# Altium PCB Flight_Controller.PcbDoc (part 4 of 4)
Units mil, origin at the board's own origin, x right, y up, seen from the top; angles counter-clockwise.
Board outline 2353.5 x 3084.1 mil, 4 copper layers (Top Layer, Layer 2, Layer 1, Bottom Layer), stack 62.48 mil thick; 95 components, 80 nets, 358 pads, 134 vias.
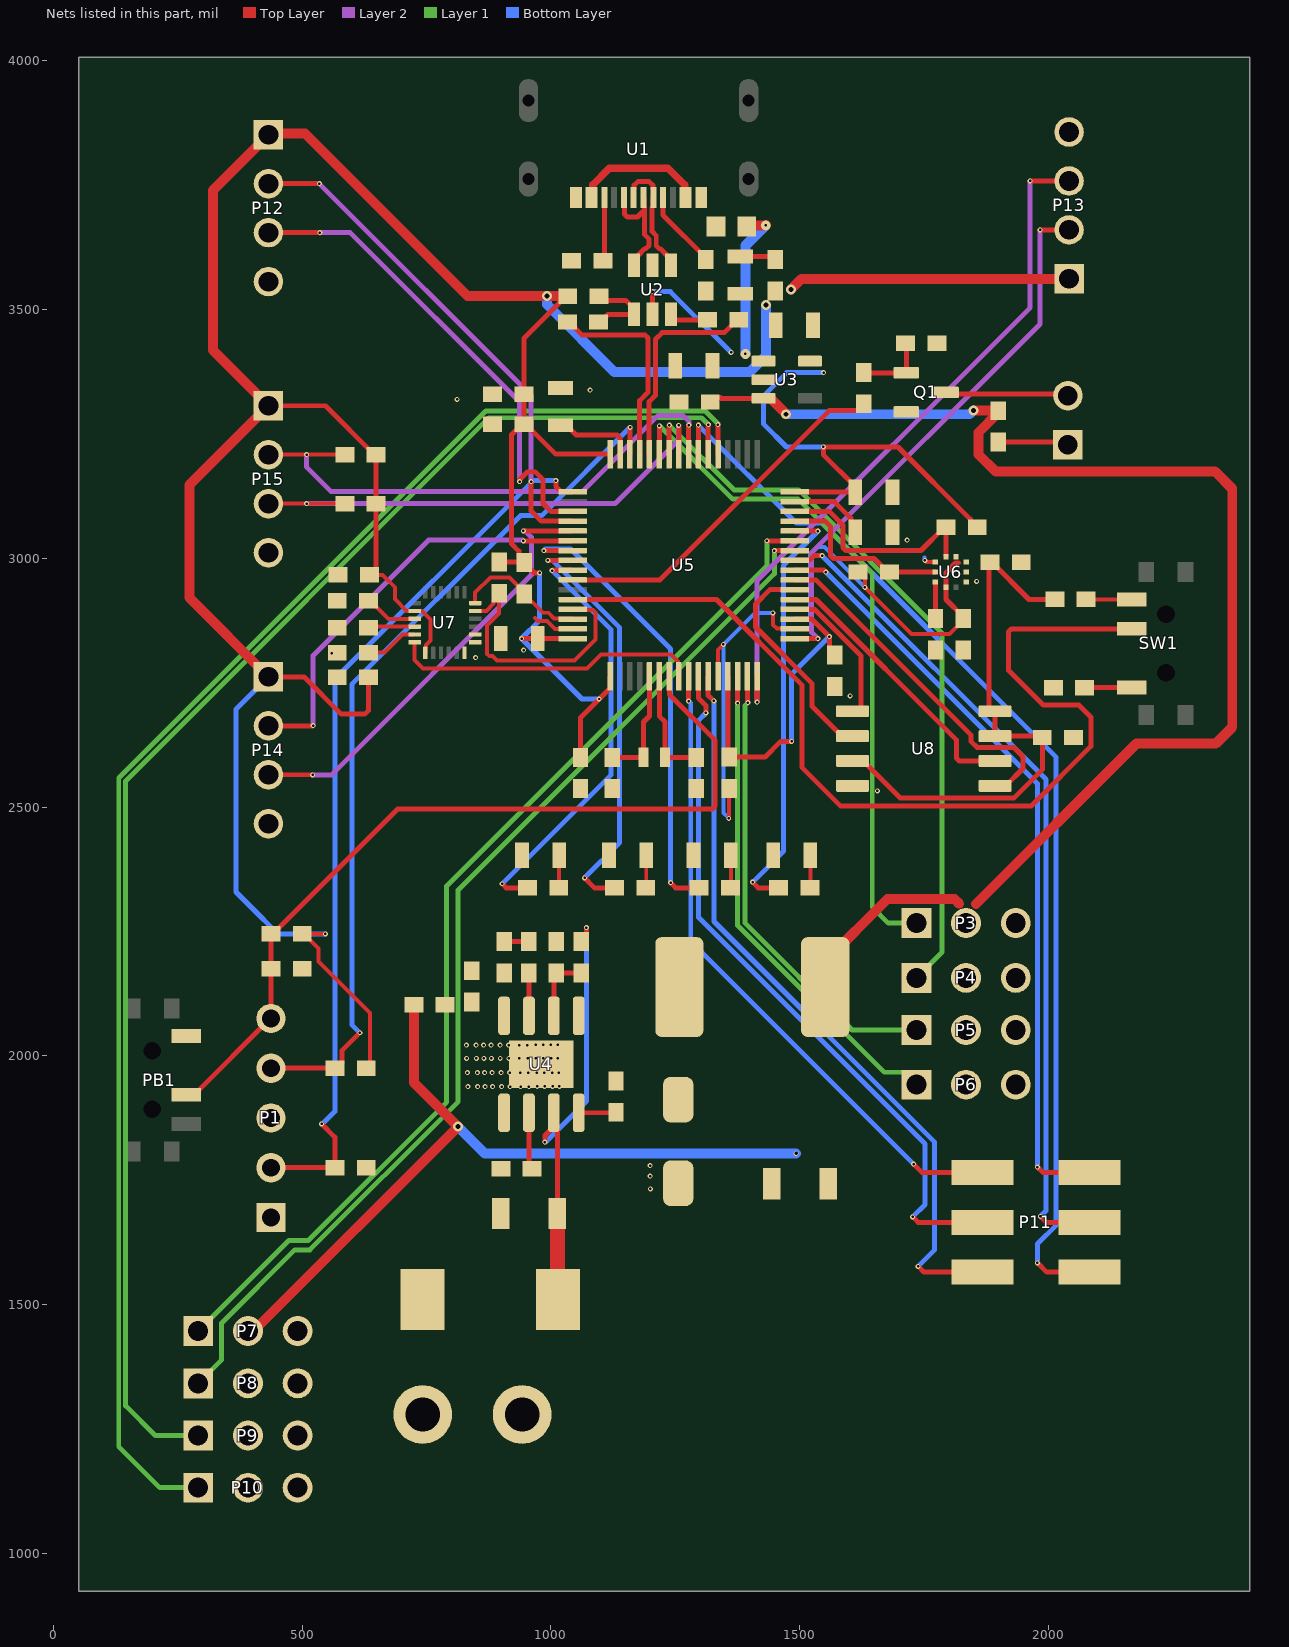
[diagram p4: the nets of this part, all layers, seen from the top]

## Part data (continued)
U8: "SPI Serial EEPROM Family, 8-bit, 20 MHz, 2.5 to 5.5V, -40°Cto 125°C, SOIJ-8, RoHS", Case/Package=SOIC, Frequency=20MHz, Manufacturer=Microchip, Manufacturer Lifecycle Status=REL, Manufacturer Part Number=25LC1024-E/SM, Max Operating Temperature=125°C, Max Supply Voltage=5.5V, Min Operating Temperature=-40°C, Min Supply Voltage=2.5V, Nominal Supply Current=10mA, Category=EEPROM, ComponentLink1Description=https://datasheet.octopart.com:443/25LC1024-E-SM-Microchip-datasheet-159614136.pdf?src-supplier=Microchip, ComponentLink1URL=https://datasheet.octopart.com:443/25LC1024-E-SM-Microchip-datasheet-159614136.pdf?src-supplier=Microchip, ComponentLink2Description=https://datasheet.octopart.com:443/25LC1024-E/SM-Microchip-datasheet-8835771.pdf?src-supplier=Farnell, ComponentLink2URL=https://datasheet.octopart.com:443/25LC1024-E/SM-Microchip-datasheet-8835771.pdf?src-supplier=Farnell, ComponentLink3Description=https://datasheet.octopart.com:443/25LC1024-E/SM-Microchip-datasheet-14358349.pdf?src-supplier=Farnell, ComponentLink3URL=https://datasheet.octopart.com:443/25LC1024-E/SM-Microchip-datasheet-14358349.pdf?src-supplier=Farnell, ComponentLink4Description=https://datasheet.octopart.com:443/25LC1024-E/SM-Microchip-datasheet-14153211.pdf?src-supplier=iiiC, ComponentLink4URL=https://datasheet.octopart.com:443/25LC1024-E/SM-Microchip-datasheet-14153211.pdf?src-supplier=iiiC, ComponentLink5Description=https://datasheet.octopart.com:443/25LC1024-E/SM-Microchip-datasheet-11406.pdf?src-supplier=Mouser, ComponentLink5URL=https://datasheet.octopart.com:443/25LC1024-E/SM-Microchip-datasheet-11406.pdf?src-supplier=Mouser, ComponentLink6Description=http://sigma.octopart.com:80/188449428/materials_sheet/Microchip-25LC1024-E-SM.pdf?src-supplier=Compliance+Statements, ComponentLink6URL=http://sigma.octopart.com:80/188449428/materials_sheet/Microchip-25LC1024-E-SM.pdf?src-supplier=Compliance+Statements, ComponentLink7Description=http://sigma.octopart.com:80/193394468/materials_sheet/Microchip-25LC1024-E-SM.pdf?src-supplier=Compliance+Statements, ComponentLink7URL=http://sigma.octopart.com:80/193394468/materials_sheet/Microchip-25LC1024-E-SM.pdf?src-supplier=Compliance+Statements, ComponentLink8Description=http://sigma.octopart.com:80/rohs_statement/Microchip-company-71.pdf?src-supplier=Compliance+Statements, ComponentLink8URL=http://sigma.octopart.com:80/rohs_statement/Microchip-company-71.pdf?src-supplier=Compliance+Statements, ComponentLink9Description=http://sigma.octopart.com:80/reach_statement/Microchip-company-70.pdf?src-supplier=Compliance+Statements, ComponentLink9URL=http://sigma.octopart.com:80/reach_statement/Microchip-company-70.pdf?src-supplier=Compliance+Statements, ComponentLink10Description=http://sigma.octopart.com:80/conflict_mineral_statement/Microchip-company-69.pdf?src-supplier=Compliance+Statements, ComponentLink10URL=http://sigma.octopart.com:80/conflict_mineral_statement/Microchip-company-69.pdf?src-supplier=Compliance+Statements, ComponentLink11Description=http://sigma.octopart.com:80/conflict_mineral_statement/Microchip-company-68.pdf?src-supplier=Compliance+Statements, ComponentLink11URL=http://sigma.octopart.com:80/conflict_mineral_statement/Microchip-company-68.pdf?src-supplier=Compliance+Statements, Contact Plating=Tin, Country of Assembly=Thailand, Country of Fabrication="United States of America", Country of Origin=Thailand, Density=1Mb, Export Control Classification Number (ECCN) Code=3A991.b.1.b.2, Harmonized Tariff Schedule (HTS) Code=8542.32.0051, Height=1.98mm, HS Code=8542.32.0051, Lead Free="Lead Free", Length=5.26mm, Lifecycle Status=Production, Max Frequency=20MHz, Memory Type=EEPROM, Mount="Surface Mount", Number of Pins=8, Number of Words=128000, Packaging=Rail/Tube, Pricing 1="1=7,43, 25=6,5, 100=5,39, 250=4,83 (EUR)", Projected EOL Date=2034-05-15, Radiation Hardening=No, REACH SVHC=No, RoHS=Compliant, Schedule B="8542320050, 8542320050|8542320050|8542320050|8542320050|8542320050", Stock 1=4330, Supplier 1=Farnell, Supplier Part Number 1=25LC1024-E/SM, Width=5.25mm, Interface="SPI, Serial", Introduction Date=2007-05-15
X1: "CRYSTAL 32.768kHz ±20ppm Crystal 12.5pF 90 kOhm -40°C ^ 85°C Surface Mount 2-SMD", Case/Package=CSMD, ESR (Equivalent Series Resistance)=90kR, Frequency=32.768kHz, Frequency Tolerance=20ppm, Load Capacitance=12.5pF, Manufacturer=Abracon, Manufacturer Part Number=ABS05-32.768KHZ-T, Max Operating Temperature=85°C, Min Operating Temperature=-40°C, Operating Frequency="32.768 kHz", Package Quantity=3000, Supplier Part Number 1=535-11899-6-ND, Category=Crystals, ComponentLink1Description=https://datasheet.ciiva.com/23810/abs05-23810480.pdf?src-supplier=Newark, ComponentLink1URL=https://datasheet.ciiva.com/23810/abs05-23810480.pdf?src-supplier=Newark, ComponentLink2Description=https://datasheet.ciiva.com/6728/abs05-6728949.pdf?src-supplier=Digikey, ComponentLink2URL=https://datasheet.ciiva.com/6728/abs05-6728949.pdf?src-supplier=Digikey, ComponentLink3Description=https://datasheet.ciiva.com/6728/abs05-6728950.pdf?src-supplier=Digikey, ComponentLink3URL=https://datasheet.ciiva.com/6728/abs05-6728950.pdf?src-supplier=Digikey, ComponentLink4Description=https://datasheet.ciiva.com/16411/abs05-16411149.pdf?src-supplier=Future+Electronics, ComponentLink4URL=https://datasheet.ciiva.com/16411/abs05-16411149.pdf?src-supplier=Future+Electronics, Depth=1mm, Height=0.5mm, Lead Free="Lead Free", Length=1.6mm, Mount="Surface Mount", Number of Pins=2, Packaging="Tape and Reel", Pricing 1="1=0,75, 10=0,628, 50=0,565, 100=0,5022, 500=0,4771, 1000=0,40177 (USD)", Radiation Hardening=No, Reach SVHC Compliant=No, RoHS=Yes, RoHS Compliant=Yes, Series=ABS05, Series Resistance=90kR, Stock 1=131313, Supplier 1=Digikey, Termination=SMD/SMT, Tolerance=20ppm, Width=1mm

## Via types
v1: diameter 10, hole 5, Top Layer to Bottom Layer, 101 vias
v2: diameter 10, hole 5, Top Layer to Layer 2, 16 vias
v3: diameter 10, hole 5, Top Layer to Layer 1, 8 vias
v4: diameter 20, hole 10, Top Layer to Bottom Layer, 6 vias
v5: diameter 20, hole 5, Top Layer to Bottom Layer, 2 vias
v6: diameter 10, hole 7, Top Layer to Bottom Layer, 1 vias

## Nets (pads, with @x,y where several pads share a name; then routed paths per layer and width w, separated by ;. In a path a pad name is that pad's centre, name@x,y a point inside that pad or via, vN(x,y) a via of type N, cw(c..) or ccw(c..) an arc to the next point about the centre after c; other vN are vias at no path point)
3V3: P1.1
+3V3: C2.2 C8.2 C9.2 C10.2 C11.2 C12.2 C13.2 C14.2 C21.2 C22.2 C23.2 C24.2 C25.2 P12.1 P13.1 P14.1 P15.1 R5.2 R6.2 R13.2 R15.1 R19.1 R25.2 R26.2 R27.2 R28.2 R32.2 R33.2 U3.5 U5.1 U5.13 U5.19 U5.32 U5.48 U5.64 U6.1 U6.6 U6.10 U7.8 U7.13 U8.3 U8.7 U8.8 | length 10360.3
  Top Layer w8: R13.2@500.5,2245 R13.2@504,2245 ; v1(547.1,2245.3) 504.3,2245.3 R13.2@504,2245 ; R15.1@629,1975 637,1983 637,2085.73 533.37,2189.36 533.37,2215.63 R13.2@504,2245 ; C23.2@635.29,2966.96 638.5,2966.96 661.74,2966.96 686.76,2941.94 686.76,2918.24 710.35,2894.65 726.14,2894.65 U7.8@726.47,2894.32 726.8,2893.99 741.49,2893.99 758.2,2877.28 758.2,2834.83 749.35,2825.98 749.35,2821.93 748.26,2820.84 748.26,2810.2 U7.13@747.93,2809.87 ; R26.2@1618,2972.6 1619.9,2972.6 1631.4,2961.1 v1(1631.4,2941.9) 1725.5,2847.8 1801.82,2847.8 1829.5,2875.48 C22.2@1829.5,2878.98
  Top Layer w10: P14.1@432.5,2761.85 504.07,2761.85 579.12,2686.8 626,2686.8 633.8,2694.6 C24.2@633.8,2760.7 ; P15.1@432.5,3306.85 547.07,3306.85 645.5,3208.43 R32.2@649,3208.43 R33.2@649,3110 649,2977.46 C23.2@638.5,2966.96 ; R27.2@896.4,2993 R28.2@945.2,2993 ; v1(941.3,2838.8) 941.4,2838.9 C14.2@974.1,2838.9 974.44,2838.56 U5.64@1044.17,2838.56 ; v1(977.8,2970.7) 967.5,2970.7 960.4,2977.8 956.9,2977.8 946.4,2988.3 R28.2@946.4,2991.8 R28.2@945.2,2993 ; R5.2@1034.2,3527.2 1030.7,3527.2 946.1,3442.6 C13.2@946.1,3330 C9.2@946.1,3270 ; C12.2@1059.79,2599.98 1059.79,2679.89 v1(1097.2,2717.3) 1097.52,2717.3 1119.25,2739.03 1119.25,2762.46 U5.1@1119.76,2762.97 ; U5.48@1119.76,3209.43 1010.17,3209.43 949.6,3270 C9.2@946.1,3270 ; U5.13@1355.98,2762.97 1355.98,2603.12 C11.2@1358.7,2600.4 1430.6,2600.4 1462.5,2632.3 v1(1484.1,2632.3) ; U5.19@1490.63,2877.93 1490.79,2877.77 1525.33,2877.77 v1(1560.2,2842.9) 1560.2,2816.1 C10.2@1570.7,2805.6 ; U5.32@1490.63,3133.84 1610.86,3133.84 C8.2@1612.1,3132.6 1612.1,3144.41 1548.1,3208.41 v1(1548.1,3224.1) 1698.21,3224.1 1843.5,3078.81 1843.5,3073.1 1854,3062.6 R25.2@1857.5,3062.6 ; U8.3@1606.69,2592.7 1627.95,2592.7 1702.05,2518.6 1931.7,2518.6 1988.2,2575.1 C25.2@1988.2,2639.9 1985.4,2642.7 U8.7@1893.31,2642.7 U8.8@1893.31,2692.7 1888.01,2692.7 1881,2699.71 1881,2974.3 ; 1819.5,2990.6 1813.9,2990.6 1794.66,2971.36 U6.6@1794.66,2941.6 1794.66,2917.32 1829.5,2882.48 C22.2@1829.5,2878.98 ; C21.2@1883,2992.6 1886.5,2992.6 1961.62,2917.48 R19.1@2013.5,2917.48 ; R28.2@945.2,2993 935.9,3002.3 935.9,3014.59 921.58,3028.91 921.58,3248.98 942.6,3270 C9.2@946.1,3270
  Top Layer w20: P14.1@432.5,2761.85 273.3,2921.05 273.3,3147.65 P15.1@432.5,3306.85 320.75,3418.6 320.75,3740.1 P12.1@432.5,3851.85 434.75,3854.1 505.7,3854.1 832.6,3527.2 v4(992.2,3527.2) R5.2@1030.7,3527.2 ; v4(1482.7,3540.9) 1503.75,3561.95 P13.1@2042,3561.95
  Bottom Layer w8: v1(1560.2,2842.9) 1520.8,2882.3 1520.8,3006.81 1537.22,3023.24 1550.06,3023.24 v1(1631.4,2941.9)
  Bottom Layer w10: P14.1@432.5,2761.85 367.1,2696.45 367.1,2329.4 397.5,2299 451.2,2245.3 v1(547.1,2245.3) ; v1(977.8,2970.7) 977.8,2875.3 v1(941.3,2838.8) 1062.8,2717.3 v1(1097.2,2717.3) ; v1(1484.1,2632.3) 1484.1,2766.8 v1(1560.2,2842.9) ; v1(1548.1,3224.1) 1473.9,3224.1 1428.1,3269.9 1428.1,3327.3 1474.3,3373.5 v1(1548.4,3373.5)
  Bottom Layer w20: v4(992.2,3527.2) 992.2,3510.22 1128.1,3374.32 1399.48,3374.32 1432.7,3407.54 v4(1432.7,3509.1)
+5V: C1.2 C3.2 C7.2 F1.1 L1.2 P3.2 P4.2 P5.2 P6.2 P7.2 P8.2 P9.2 P10.2 R7.2 R14.1 U2.5 U3.1 U3.3 | length 4884.7
  Top Layer w10: U2.5@1204.6,3490.49 1204.6,3536 v1(1205,3536.4) ; 1340.9,3323.5 1342.5,3321.9 U3.3@1427.94,3321.9
  Top Layer w20: P7.2@391.3,1446.6 402.6,1446.6 v4(813.5,1857.5) 724.7,1946.3 R7.2@724.7,2102.9 ; F1.1@1394.11,3667.1 1396.71,3669.7 v5(1432.3,3669.7) v5@1432.8,3670.2 ; U3.3@1427.94,3321.9 1441.53,3321.9 1472.7,3290.73 v4(1472.7,3289.8) ; L1.2@1551.85,2138.2 1551.85,2189.97 1676.8,2314.92 1811.98,2314.92 1821.2,2305.7 ; v4(1849.68,3297.53) 1899.07,3297.53 R14.1@1899.8,3296.8 1899.8,3293.3 1859.9,3253.4 1859.9,3209.1 1894.61,3174.39 2335.9,3174.39 2370.1,3140.18 2370.1,2660.6 2336.9,2627.4 2177.3,2627.4 1855,2305.1
  Bottom Layer w10: v1(1205,3536.4) 1240.4,3536.4 v1(1362.5,3414.3)
  Bottom Layer w20: v4(813.5,1857.5) 867.3,1803.7 v6(1493.3,1803.7) ; v5(1391.2,3411.3) 1391.2,3628.6 v5(1432.3,3669.7) ; v4(1472.7,3289.8) 1841.95,3289.8 v4(1849.68,3297.53)
BOOT0: SW1.2 U5.60 | length 1950.9
  Top Layer w10: U5.60@1044.17,2917.3 1333.3,2917.3 1504.8,2745.8 1504.8,2580.1 1582.3,2502.6 1966.4,2502.6 2085.9,2622.1 2085.9,2681 2061.8,2705.1 1990.25,2705.1 1920.4,2774.95 1920.4,2852.4 1926.43,2858.43 SW1.2@2168,2858.43
ESC1_PWM: P6.1 U5.14 | length 993
  Top Layer w10: v3(1375.5,2708.89) 1375.67,2709.06 U5.14@1375.67,2762.97
  Layer 1 w10: v3(1375.5,2708.89) 1375.5,2262.18 1670.76,1966.92 1709.78,1966.92 P6.1@1734.9,1941.8
ESC2_PWM: P5.1 U5.15 | length 931.9
  Top Layer w10: U5.15@1395.35,2762.97 1395.35,2710.75 v3(1396.2,2709.9)
  Layer 1 w10: v3(1396.2,2709.9) 1390.9,2704.6 1390.9,2266.58 1605.68,2051.8 P5.1@1734.9,2051.8
ESC3_PWM: P4.1 U5.42 | length 1494
  Top Layer w10: U5.42@1237.87,3209.43 1237.87,3267.03 v3(1238.58,3267.73)
  Layer 1 w10: v3(1238.58,3267.73) 1368.57,3137.75 1498.55,3137.75 1786.5,2849.8 1786.5,2208.4 P4.1@1734.9,2156.8
ESC4_PWM: P3.1 U5.43 | length 1380.7
  Top Layer w10: U5.43@1218.19,3209.43 1218.19,3266.09 v3(1218.6,3266.5)
  Layer 1 w10: v3(1218.6,3266.5) 1366.04,3119.06 1497.44,3119.06 1646.4,2970.1 1646.4,2299.1 1678.7,2266.8 P3.1@1734.9,2266.8
GND: C1.1 C2.1 C3.1 C6.1 C7.1 C8.1 C9.1 C10.1 C11.1 C12.1 C13.1 C14.1 C15.1 C16.1 C17.1 C18.1 C19.1 C20.2 C21.1 C22.1 C23.1 C24.1 C25.1 D1.1 D3.A D4.1 D5.1 D6.1 D7.1 J1.2 P1.3 P3.3 P4.3 P5.3 P6.3 P7.3 P8.3 P9.3 P10.3 P12.4 P13.4 P14.4 P15.4 PB1.1 Q1.2 R3.1 R4.1 R9.2 R10.1 R11.1 R12.1 R16.1 R18.1 R20.1 R29.1 R30.1 R31.1 U1.A1/B12 U1.B1/A12 U2.2 U3.2 U4.5 U4.9 U5.12 U5.18 U5.63 U6.3 U6.8 U6.9 U7.18 U7.19 U7.20 U8.4 | length 795.1
  Top Layer w8: 967.9,2880.1 973.51,2874.49 992.02,2874.49 1008.27,2858.25 U5.63@1044.17,2858.25 ; U5.12@1336.3,2762.97 1336.3,2816.3 v1(1347.2,2827.2) ; v1(1357.9,2477.2) 1357.9,2477.74 1358.7,2478.54 C11.1@1358.7,2537.4 ; v1(1446.7,2890.5) 1447.08,2890.12 1447.08,2866.16 1454.54,2858.7 1490.18,2858.7 U5.18@1490.63,2858.25 ; v1(1752,2996) 1755.72,2992.28 U6.3@1773.5,2992.28
  Bottom Layer w8: v1(1357.9,2477.2) 1357.9,2477.74 1347.2,2488.44 v1(1347.2,2827.2) 1410.5,2890.5 v1(1446.7,2890.5) ; 1751.62,3001.78 1751.62,2996.38 v1(1752,2996)
  other v1: 1200.3,1732.3 1199.9,1758.1 1199.8,1779.1 833.5,1938.1 853.2,1938.1 868.2,1938.1 883.2,1938.1 901.2,1938.1 918.4,1938.1 939.4,1938.1 956.18,1938.1 972.89,1938.28 987.87,1938.28 1003.61,1938.28 1017.29,1938.28 832.59,1966.17 852.29,1966.17 867.29,1966.17 882.29,1966.17 900.29,1966.17 917.49,1966.17 938.49,1966.17 955.27,1966.17 971.98,1966.35 986.95,1966.35 1002.7,1966.35 1016.38,1966.35 830.76,1994.7 850.46,1994.7 865.46,1994.7 880.46,1994.7 898.46,1994.7 915.66,1994.7 936.66,1994.7 953.44,1994.7 970.16,1994.87 985.13,1994.87 1000.87,1994.87 1014.56,1994.87 830.31,2021.62 850.01,2021.62 865.01,2021.62 880.01,2021.62 898.01,2021.62 915.21,2021.62 936.21,2021.62 952.98,2021.62 969.7,2021.8 984.67,2021.8 1000.42,2021.8 1014.1,2021.8 1656.5,2532.4 1601.7,2723.6 848.8,2800.6 560.2,2809.7 945.5,2815.6 1856.3,2953.8 1716.5,3036.9 812,3319.9 1079,3338.1
LED_B: R22.1 U5.55 | length 929
  Top Layer w10: v1(986.1,3015.8) 986.17,3015.73 U5.55@1044.17,3015.73 ; v1(1240.9,2348) 1251.1,2337.8 R22.1@1298.1,2337.8
  Bottom Layer w10: v1(986.1,3015.8) 989.3,3019 1040.1,3019 1240.9,2818.2 v1(1240.9,2348)
LED_G: R24.1 U5.57 | length 864.4
  Top Layer w10: v1(902.3,2345.9) 910.4,2337.8 R24.1@953.1,2337.8 ; v1(1002.94,2975.25) 1004.04,2976.36 U5.57@1044.17,2976.36
  Bottom Layer w10: v1(902.3,2345.9) 1120.7,2564.3 1120.7,2857.49 v1(1002.94,2975.25)
LED_R: R23.1 U5.56 | length 851.1
  Top Layer w10: v1(994.3,2996.1) 1044.11,2996.1 U5.56@1044.17,2996.04 ; v1(1067.99,2357.61) 1087.8,2337.8 R23.1@1128.1,2337.8
  Bottom Layer w10: v1(994.3,2996.1) 1003.3,2996.1 1138.7,2860.7 1138.7,2428.31 v1(1067.99,2357.61)
LED_Y: R21.1 U5.28 | length 863.8
  Top Layer w10: v1(1405.9,2349) 1417.1,2337.8 R21.1@1458.1,2337.8 ; U5.28@1490.63,3055.1 1537.1,3055.1 v1(1537.2,3055)
  Bottom Layer w10: v1(1405.9,2349) 1468.1,2411.2 1468.1,2985.9 v1(1537.2,3055)
MCU_BUZZER: R17.1 U5.58 | length 734.3
  Top Layer w10: U5.58@1044.17,2956.67 1219.37,2956.67 1559.6,3296.9 1619.2,3296.9 1629.7,3307.4 R17.1@1629.7,3310.9
NetC4_1: C4.1 U4.8 | length 75.4
  Top Layer w10: U4.8@1056.2,1885.46 1130.26,1885.46 C4.1@1131.2,1886.4
NetC4_2: C4.2 D3.C L1.1 U4.1
NetC5_1: C5.1 U4.3 | length 86.1
  Top Layer w10: U4.3@956.2,2080.34 C5.1@956.2,2166.4
NetC5_2: C5.2 R9.1 | length 50
  Top Layer w10: R9.1@906.2,2229.4 C5.2@956.2,2229.4
NetC6_2: C6.2 D2.C R8.2 U4.7 | length 944.4
  Top Layer w10: v1(988.4,1826.5) 988.4,1839.94 1000.24,1851.78 1000.24,1879.5 U4.7@1006.2,1885.46 1006.2,1857.74 1013.29,1850.66 C6.2@1013.29,1682.9 ; D2.C@1013.29,1510.94 D2.C@1014.52,1509.7 ; R8.2@1061.2,2229.4 1071.7,2239.9 1071.7,2257.49 v1(1071.81,2257.59)
  Top Layer w30: D2.C@1013.29,1510.94 C6.2@1013.29,1682.9
  Bottom Layer w10: v1(988.4,1826.5) 989.5,1826.5 1071.81,1908.81 v1(1071.81,2257.59)
NetC16_2: C16.2 U5.47 | length 163
  Top Layer w10: C16.2@1019.6,3267.6 1031.41,3267.6 1050.64,3248.37 1133.08,3248.37 1138.94,3242.51 1138.94,3209.94 U5.47@1139.45,3209.43
NetC17_2: C17.2 U5.31 | length 158.4
  Top Layer w10: U5.31@1490.63,3114.15 1570.05,3114.15 1603.32,3080.88 1603.32,3073.19 1612.1,3064.41 C17.2@1612.1,3052.6
NetC20_1: C20.1 U7.10 | length 93.6
  Top Layer w8: C20.1@633.8,2860.7 635.93,2862.83 U7.10@726.47,2862.83
NetD1_2: D1.2 R6.1 | length 72.4
  Top Layer w10: D1.2@1381.4,3606.8 1445.5,3606.8 R6.1@1451.4,3600.9
NetD4_2: D4.2 R21.2 | length 65.4
  Top Layer w8: R21.2@1521.1,2337.8 1522,2338.7 D4.2@1522,2402.8
NetD5_2: D5.2 R22.2 | length 65.4
  Top Layer w8: R22.2@1361.1,2337.8 1362,2338.7 D5.2@1362,2402.8
NetD6_2: D6.2 R23.2 | length 65.4
  Top Layer w8: R23.2@1191.1,2337.8 1192,2338.7 D6.2@1192,2402.8
NetD7_2: D7.2 R24.2 | length 65.4
  Top Layer w8: R24.2@1016.1,2337.8 1017,2338.7 D7.2@1017,2402.8
NetP2_1: P2.1 R14.2 | length 142.1
  Top Layer w10: R14.2@1899.8,3233.8 2034.8,3233.8 P2.1@2039.8,3228.8
NetP2_2: P2.2 Q1.3 | length 247.8
  Top Layer w10: Q1.3@1794.76,3333.8 1798.05,3330.51 2036.51,3330.51 P2.2@2039.8,3327.23
NetP12_2: P12.2 U5.52 | length 1029
  Top Layer w10: P12.2@432.5,3753.43 534.83,3753.43 v2(534.9,3753.5) ; v2(960.4,3154.2) 960.4,3095.61 981.23,3074.78 U5.52@1044.17,3074.78
  Layer 2 w10: v2(534.9,3753.5) 960.4,3328 v2(960.4,3154.2)
NetP12_3: P12.3 U5.51 | length 985.4
  Top Layer w10: P12.3@432.5,3655 v2(535.8,3655) v2@536.3,3654.5 ; v2(937.58,3154.4) 937.58,3158.64 953.13,3174.2 968.68,3174.2 984.46,3158.42 984.46,3110.24 1000.23,3094.47 U5.51@1044.17,3094.47
  Layer 2 w10: v2(535.8,3655) 596.9,3655 937.58,3314.32 v2(937.58,3154.4)
NetP13_2: P13.2 U5.17 | length 1122.3
  Top Layer w10: U5.17@1490.63,2838.56 v2(1537.24,2838.56) v2@1537.4,2838.4 ; v2(1983.8,3660.37) P13.2@2042,3660.37
  Layer 2 w10: v2(1537.24,2838.56) 1524.6,2851.2 1524.6,3012.03 1983.8,3471.23 v2(1983.8,3660.37)
NetP13_3: P13.3 U5.16 | length 1405.5
  Top Layer w10: v2(1415.04,2710.96) U5.16@1415.04,2762.97 ; v2(1963.8,3758.9) 1963.9,3758.8 P13.3@2042,3758.8
  Layer 2 w10: v2(1415.04,2710.96) 1415.04,2955.47 1963.8,3504.23 v2(1963.8,3758.9)
NetP14_2: P14.2 U5.54 | length 849.4
  Top Layer w10: P14.2@432.5,2663.43 521.83,2663.43 v2(522.06,2663.66) ; v2(945.1,3035.1) 945.41,3035.41 U5.54@1044.17,3035.41
  Layer 2 w10: v2(522.06,2663.66) 522.06,2804.34 754.32,3036.6 943.6,3036.6 v2(945.1,3035.1)
NetP14_3: P14.3 U5.53 | length 891.8
  Top Layer w10: P14.3@432.5,2565 521.3,2565 v2(521.4,2564.9) ; v2(944.9,3055.1) U5.53@1044.17,3055.1
  Layer 2 w10: v2(521.4,2564.9) 559.42,2564.9 961.1,2966.58 961.1,3042.83 948.83,3055.1 v2(944.9,3055.1)
NetP15_2: P15.2 R32.1 U5.40 | length 1101.7
  Top Layer w8: P15.2@432.5,3208.43 v2(509.25,3208.43) R32.1@586,3208.43
  Top Layer w10: U5.40@1277.24,3209.43 1277.24,3267.5 v2(1277.56,3267.81)
  Layer 2 w10: v2(509.25,3208.43) 509.25,3183.55 558.6,3134.2 1063.2,3134.2 1216.46,3287.46 1265.53,3287.46 1277.56,3275.43 v2(1277.56,3267.81)
NetP15_3: P15.3 R33.1 U5.41 | length 1042.1
  Top Layer w8: P15.3@432.5,3110 v2(509.25,3110) R33.1@586,3110
  Top Layer w10: v2(1257.24,3267.46) 1257.56,3267.15 U5.41@1257.56,3209.43
  Layer 2 w10: v2(509.25,3110) 1129.1,3110 1257.24,3238.14 v2(1257.24,3267.46)
NetQ1_1: Q1.1 R17.2 R18.2 | length 145.1
  Top Layer w10: R17.2@1629.7,3373.9 1630.43,3373.17 Q1.1@1714.84,3373.17 1714.84,3431.06 R18.2@1713.6,3432.3
NetR1_1: R1.1 U2.6 | length 79.4
  Top Layer w10: U2.6@1242,3490.49 1242,3487.21 1249.81,3479.4 R1.1@1314.9,3479.4
NetR1_2: R1.2 U5.44 | length 420
  Top Layer w10: U5.44@1198.5,3209.43 1197.99,3209.94 1197.99,3315.05 1210.6,3327.66 1210.6,3440.59 1223.91,3453.9 1348.9,3453.9 1374.4,3479.4 R1.2@1377.9,3479.4
NetR2_1: R2.1 R5.1 U2.4 | length 169.3
  Top Layer w10: R2.1@1096.3,3475.3 1099.8,3475.3 1114.99,3490.49 U2.4@1167.2,3490.49 1167.2,3502.3 1150.7,3518.8 1105.6,3518.8 R5.1@1097.2,3527.2
NetR2_2: R2.2 U5.45 | length 416.2
  Top Layer w10: R2.2@1033.3,3475.3 1036.8,3475.3 1063.3,3448.8 1189.74,3448.8 1195.6,3442.94 1195.6,3333.87 1178.82,3317.09 U5.45@1178.82,3209.43
NetR3_2: R3.2 U1.B5 | length 128.8
  Top Layer w10: R3.2@1104.8,3598 1107.69,3600.89 U1.B5@1107.69,3725.6
NetR4_2: R4.2 U1.A5 | length 160.1
  Top Layer w10: U1.A5@1225.83,3725.6 1225.83,3689.97 1311.4,3604.4 R4.2@1311.4,3600.9
NetR7_1: R7.1 R10.2 U4.4
NetR8_1: R8.1 R11.2 U4.2 | length 138.1
  Top Layer w10: U4.2@1006.2,2080.34 1006.7,2080.84 1006.7,2161.9 R11.2@1011.2,2166.4 R8.1@1061.2,2166.4
NetR12_2: R12.2 U4.6 | length 115.3
  Top Layer w10: U4.6@956.2,1885.46 956.2,1779.4 R12.2@962.7,1772.9
NetR19_2: R19.2 SW1.3 | length 91.5
  Top Layer w8: R19.2@2076.5,2917.48 SW1.3@2168,2917.48
NetR20_2: R20.2 SW1.1 | length 94.6
  Top Layer w10: R20.2@2073.4,2740.32 SW1.1@2168,2740.32
NetR25_1: R25.1 U5.30 U6.2 | length 440.8
  Top Layer w10: U5.30@1491.14,3094.47 1559.83,3094.47 1587.32,3066.98 1587.32,3021.76 1593.18,3015.9 1744.3,3015.9 1791,3062.6 R25.1@1794.5,3062.6 1794.66,3062.44 U6.2@1794.66,3003.6
NetR26_1: R26.1 U5.29 U6.4 | length 359.5
  Top Layer w10: U5.29@1490.63,3074.78 1551.62,3074.78 1562.1,3064.3 1562.1,3005.76 1567.96,2999.9 1650.2,2999.9 1677.5,2972.6 U6.4@1773.5,2972.6
NetR27_1: R27.1 U5.61 U7.23 | length 538.8
  Top Layer w8: U7.23@848.13,2894.32 848.46,2894.65 870.44,2894.65 884.9,2909.11 884.9,2915 890.51,2920.61 R27.1@896.4,2920.61 ; R27.1@896.4,2930 R27.1@896.4,2920.61 ; U5.61@1044.17,2897.62 1045.68,2896.11 1085.21,2896.11 1089.9,2891.42 1089.9,2836.51 1047.69,2794.3 891.8,2794.3 882.79,2803.31 876.79,2803.31 872.1,2808 872.1,2865.21 896.4,2889.51 R27.1@896.4,2920.61
NetR28_1: R28.1 U5.62 U7.24 | length 272.3
  Top Layer w8: U7.24@848.13,2910.07 848.13,2931.33 878.6,2961.8 916.9,2961.8 946.4,2932.3 R28.1@946.4,2925.3 ; R28.1@946.4,2928.8 R28.1@946.4,2925.3 ; U5.62@1044.17,2877.93 1042.66,2879.44 1006.87,2879.44 995.61,2890.7 984.5,2890.7 961.4,2913.8 957.9,2913.8 R28.1@946.4,2925.3
NetR29_2: R29.2 U7.9 | length 107.6
  Top Layer w8: R29.2@633.8,2914.72 637.3,2914.72 673.44,2878.57 U7.9@726.47,2878.57
NetR30_2: R30.2 U6.5 | length 73.9
  Top Layer w10: R30.2@1773.5,2878.98 U6.5@1773.5,2952.91
NetR31_2: R31.2 U7.11 | length 107.7
  Top Layer w8: R31.2@633.8,2810.7 665.31,2810.7 701.69,2847.08 U7.11@726.47,2847.08
NetU5_8: U5.8 U7.12 | length 619.7
  Top Layer w8: U7.12@726.47,2831.33 726.47,2795.93 743.5,2778.9 1073.2,2778.9 1101.1,2806.8 1241.83,2806.8 1246.72,2801.91 1256.05,2792.58 1256.05,2764.48 U5.8@1257.56,2762.97
NetU5_20: U5.20 U8.1 | length 296.4
  Top Layer w10: U5.20@1490.63,2897.62 1491.14,2897.11 1530.87,2897.11 1623.8,2804.17 1623.8,2699.71 1616.79,2692.7 U8.1@1606.69,2692.7
NetU5_21: U5.21 U8.6 | length 558.6
  Top Layer w10: U5.21@1490.63,2917.3 1533.3,2917.3 1815.4,2635.2 1815.4,2598.56 1821.26,2592.7 U8.6@1893.31,2592.7
NetU5_22: U5.22 U8.2 | length 449.5
  Top Layer w10: U5.22@1490.63,2936.99 1440.59,2936.99 1411.7,2908.1 1411.7,2862 1524.9,2748.8 1524.9,2703.23 1585.43,2642.7 U8.2@1606.69,2642.7
NetU5_23: U5.23 U8.5 | length 708.2
  Top Layer w10: U5.23@1490.63,2956.67 1491.14,2956.16 1533.77,2956.16 1845.3,2644.63 1845.3,2631.63 1857.24,2619.69 1931.41,2619.69 1949.5,2601.6 1949.5,2577.63 1914.57,2542.7 U8.5@1893.31,2542.7
NRST: C15.2 P1.5 PB1.2 R13.1 U5.7 | length 1702.6
  Top Layer w10: PB1.2@267.4,1921.77 283.15,1921.77 436.37,2075 P1.5@437.5,2075 C15.2@437.5,2175 R13.1@437.5,2245 441,2245 692.1,2496.1 1324.76,2496.1 1330.62,2501.96 1330.62,2634.09 1238.38,2726.32 1238.38,2762.46 U5.7@1237.87,2762.97
OSC_IN: C18.2 U5.5 X1.1 | length 230.4
  Top Layer w10: C18.2@1124,2599.98 X1.1@1186.36,2599.98 1186.36,2671.04 1198.5,2683.18 U5.5@1198.5,2762.97
OSC_OUT: C19.2 U5.6 X1.2 | length 234.3
  Top Layer w10: U5.6@1218.19,2762.97 1218.19,2682.85 1229.67,2671.36 X1.2@1229.67,2599.98 C19.2@1292.74,2599.98 C19.2@1292.74,2603.48
PC1: P11.A01 U5.9 | length 1313.7
  Top Layer w10: v1(1277.24,2713.26) U5.9@1277.24,2762.97 ; v1(1729.7,1782) 1746.7,1765 P11.A01@1868.02,1765
  Bottom Layer w10: v1(1277.24,2713.26) 1281.5,2709 1281.5,2230.2 v1(1729.7,1782)
PC2: P11.A02 U5.10 | length 1442.8
  Top Layer w10: U5.10@1296.93,2762.97 1296.93,2719.03 1312.1,2703.86 v1(1312.1,2689.6) ; v1(1727.7,1676.1) 1738.8,1665 P11.A02@1868.02,1665
  Bottom Layer w10: v1(1312.1,2689.6) 1312.1,2689.2 1297.5,2674.6 1297.5,2277.95 1752.4,1823.05 1752.4,1700.8 v1(1727.7,1676.1)
PC3: P11.A03 U5.11 | length 1522.3
  Top Layer w10: U5.11@1316.61,2762.97 1316.61,2724.5 1327.61,2713.5 v1(1328.1,2713.5) ; v1(1738.7,1576.8) 1750.5,1565 P11.A03@1868.02,1565
  Bottom Layer w10: v1(1328.1,2713.5) 1328.1,2269.98 1771.1,1826.98 1771.1,1609.2 v1(1738.7,1576.8)
PC4: P11.B01 U5.24 | length 1545.5
  Top Layer w10: U5.24@1490.63,2976.36 1549.14,2976.36 v1(1553,2972.5) ; v1(1978.5,1776.4) 1989.9,1765 P11.B01@2082.98,1765
  Bottom Layer w10: v1(1553,2972.5) 1978.5,2547 v1(1978.5,1776.4)
PC5: P11.B02 U5.25 | length 1682.5
  Top Layer w10: U5.25@1490.63,2996.04 1491.14,2996.55 1520.65,2996.55 1529.78,3005.69 v1(1545.5,3005.69) ; v1(1984.5,1677.1) 1996.6,1665 P11.B02@2082.98,1665
  Bottom Layer w10: v1(1545.5,3005.69) 1545.5,3005.17 1771.52,2779.15 1772.35,2779.15 1995.7,2555.8 1995.7,1688.3 v1(1984.5,1677.1)
PC8: P11.B03 U5.39 | length 2198.4
  Top Layer w10: v1(1296.85,3267.73) v1(1296.85,3267.73) U5.39@1296.93,3209.43 ; v1(1978.5,1583.8) 1997.3,1565 P11.B03@2082.98,1565
  Bottom Layer w10: v1(1296.85,3267.73) 1493.59,3071 1545.5,3071 2016.1,2600.4 2016.1,1659.45 1978.5,1621.86 v1(1978.5,1583.8)
SERVO1_PWM: P10.1 U5.37 | length 3120.9
  Top Layer w10: v3(1336.2,3269.1) 1336.3,3269 U5.37@1336.3,3209.43
  Layer 1 w10: P10.1@291.3,1131.6 214.1,1131.6 131.5,1214.2 131.5,2558.4 869.83,3296.73 1310.28,3296.73 1336.2,3270.81 v3(1336.2,3269.1)
SERVO2_PWM: P9.1 U5.38 | length 2965.8
  Top Layer w10: U5.38@1316.61,3209.43 1316.61,3269.01 v3(1316.7,3269.1)
  Layer 1 w10: P9.1@291.3,1236.6 205.2,1236.6 145.5,1296.3 145.5,2552.61 875.63,3282.73 1303.07,3282.73 v3(1316.7,3269.1)
SERVO3_PWM: P8.1 U5.26 | length 2212.6
  Top Layer w10: v3(1449.69,3015.73) U5.26@1490.63,3015.73
  Layer 1 w10: P8.1@291.3,1341.6 338.5,1388.8 338.5,1462.7 485.6,1609.8 515.8,1609.8 813.86,1907.86 813.86,2333.16 1449.69,2968.99 v3(1449.69,3015.73)
SERVO4_PWM: P7.1 U5.27 | length 2141.3
  Top Layer w10: v3(1434.69,3035.41) U5.27@1490.63,3035.41
  Layer 1 w10: P7.1@291.3,1446.6 473.3,1628.6 512.5,1628.6 790.6,1906.7 790.6,2341.3 1434.69,2985.39 v3(1434.69,3035.41)
SWCLK: P1.2 R16.2 U5.49 | length 1793.5
  Top Layer w10: P1.2@437.5,1775 R16.2@566,1775 566,1836.26 v1(539.32,1862.93) ; v1(1010.1,3156.2) 1010.1,3144.48 1020.75,3133.84 U5.49@1044.17,3133.84
  Bottom Layer w10: v1(539.32,1862.93) 540.74,1862.93 565.9,1888.1 565.9,2757.6 964.5,3156.2 v1(1010.1,3156.2)
SWDIO: P1.4 R15.2 U5.46 | length 1757.3
  Top Layer w10: P1.4@437.5,1975 569.5,1975 580,1985.5 580,2010.2 v1(616.1,2046.3) ; U5.46@1159.13,3209.43 1159.13,3263.33 v1(1159.4,3263.6)
  Bottom Layer w10: v1(616.1,2046.3) 600.1,2062.3 600.1,2746.7 939.35,3085.95 981.75,3085.95 v1(1159.4,3263.6)
USB_N: U1.A7 U1.B7 U2.1 | length 249
  Top Layer w10: U1.A7@1166.76,3725.6 1166.76,3741.1 1167.76,3742.1 1167.76,3750.24 1175.61,3758.1 1197.28,3758.1 1205.14,3750.24 1205.14,3742.1 1206.14,3741.1 U1.B7@1206.14,3725.6 1205.14,3724.6 1205.14,3707.1 1203.79,3705.76 1203.79,3657.06 1212.1,3648.75 1212.1,3628.39 1217.96,3622.53 1220.55,3622.53 1227.62,3615.46 1227.62,3615.1 1242,3600.72 U2.1@1242,3588.91
USB_P: U1.A6 U1.B6 U2.3 | length 233.2
  Top Layer w10: U1.B6@1147.06,3725.6 1148.06,3724.6 1148.06,3692.26 1153.92,3686.4 1174.3,3686.4 1185.44,3697.55 ; U2.3@1167.2,3588.91 1167.2,3600.72 1181.58,3615.1 1181.58,3615.46 1188.65,3622.53 1191.24,3622.53 1197.1,3628.39 1197.1,3642.53 1188.79,3650.84 1188.79,3697.55 1188.79,3705.76 1187.44,3707.1 1187.44,3724.6 U1.A6@1186.44,3725.6
VBUS: F1.2 U1.A4/B9 U1.B4/A9 | length 264.6
  Top Layer w15: U1.B4/A9@1082.09,3725.6 1084.09,3727.6 1084.09,3750.72 1117.47,3784.1 1235.73,3784.1 1269.1,3750.72 1269.1,3727.6 U1.A4/B9@1271.1,3725.6
VCC: D2.A J1.1
pads on no net: "PB1. " PB1. PB1.3 SW1. U1. U1.13 U1.14 U1.15 U1.16 U1.A8 U1.B8 U3.4 U5.2 U5.3 U5.4 U5.33 U5.34 U5.35 U5.36 U5.50 U5.59 U6.7 U7.1 U7.2 U7.3 U7.4 U7.5 U7.6 U7.7 U7.14 U7.15 U7.16 U7.17 U7.21 U7.22

## Polygon pours and split planes (outlines as drawn)
GND on Top Layer "TOP_GND" (solid, pour order 10): 56.1,927.05 56.1,4011.15 2409.6,4011.15 2409.6,927.05
+3V3 on Top Layer "+3V3_L01_P009" (solid, pour order 9): 1837.65,3091.65 1831.3,3085.3 1831.3,3033.5 1807.41,3009.61 1807.41,2987.79 1809.36,2985.84 1850.06,2985.84 1869.6,2966.3 1897.7,2966.3 1904.3,2972.9 1904.3,2998.4 1904.3,3077.7 1889.25,3092.75
+3V3 on Top Layer "+3V3_L01_P002" (solid, pour order 2): 1423.9,3549.3 1438.6,3564 1438.6,3565.2 1472.8,3565.2 1491.2,3546.8 1491.2,3435.1 1510.7,3415.6 1548.8,3415.6 1564.1,3400.3 1564.1,3378.5 1551.9,3366.3 1516.9,3366.3 1491.6,3391.6 1449.3,3433.9 1425.52,3457.68
+5V on Top Layer "+5V_L01_P008" (solid, pour order 8): 1786.4,2290.6 1814.5,2318.7 1857.7,2318.7 1882.3,2294.1 1882.3,1918.7 1860.2,1896.6 1813.4,1896.6 1786.4,1923.6
+5V on Top Layer "+5V_L01_P007" (solid, pour order 7): 339.3,1477.4 367.4,1505.5 410.6,1505.5 435.2,1480.9 435.2,1105.5 413.1,1083.4 366.3,1083.4 339.3,1110.4
VCC on Top Layer "VCC_L01_P003" (solid, pour order 3): 662.5,1550.9 701.2,1589.6 785.8,1589.6 824.5,1550.9 824.5,1239.9 773.5,1188.9 705.6,1188.9 660.67,1233.83
NetR7_1 on Top Layer "NETR7_1_L01_P004" (solid, pour order 4): 762.5,2112.3 782.4,2136 902.8,2136 923.8,2115 923.8,2050.1 910.3,2036.6 780.6,2036.6 762.5,2054.7
NetC4_2 on Top Layer "NETC4_2_L01_P005" (solid, pour order 5): 1036.8,2113.3 1052.8,2129.3 1097.4,2129.3 1212.3,2244.2 1296.5,2244.2 1323.8,2216.9 1323.8,1886 1289.6,1851.8 1226,1851.8 1156.3,1921.5 1118,1921.5 1101.5,1938 1101.5,1986.4 1037.52,2050.38
+5V on Top Layer "+5V_L01_P006" (solid, pour order 6): 1484.14,1708.58 1484.14,2248.07 1506.1,2269.1 1583.52,2269.1 1614.8,2242.1 1614.8,1717.4 1575.3,1677.9 1514.81,1677.9
+5V on Top Layer "+5V_L01_P001" (solid, pour order 1): 1448.31,3378.6 1389.6,3378.6 1348.6,3337.6 1348.6,3303.7 1336.5,3291.6 1305.4,3291.6 1289.8,3307.2 1289.8,3404.7 1305.9,3420.8 1441.5,3420.8 1457.15,3405.15 1457.23,3387.57
VBUS on Top Layer "VBUS_L01_P000" (solid, pour order 0): 1258.5,3750 1260.8,3752.3 1279.3,3752.3 1281.7,3749.9 1281.7,3698.1 1290.1,3689.7 1349.9,3689.7 1356.5,3683.1 1356.5,3648.2 1349.9,3641.6 1317.2,3641.6 1258.5,3700.3
GND on Bottom Layer "BOTTOM_GND" (solid, remove dead copper, pour order 11): 52.3,922.15 52.3,4006.25 2405.8,4006.25 2405.8,922.15

## Keep-outs
Keep-Out Layer:
  the board outline again, w3

## Silkscreen, mask and mechanical layers (free items; w line width, h text height)
Top Overlay:
  lines w3: 677.1,2958.7 670.8,2965 ; 670.4,2965 670.6,2965 ; 670.4,2965 677.4,2972 670.4,2965 ; 670.4,2965 704.3,2965 704.3,2732.8 ; 670.6,2965 670.8,2965 ; 670.6,2965 670.8,2965 ; 704.3,2732.8 812.3,2732.8 812.3,2487.1 705.7,2487.1 705.7,2732.8 704.3,2732.8
  text "GPS" at 2220.83,3961.85 h30
  text "TELEM" at 94.6,3960.3 h30
  text "I2C" at 100.7,3414.5 h30
  text "UART" at 79.63,2868.65 h30
  text "ESC4" at 2025.49,2250.45 h30
  text "ESC1" at 2022.93,1921.75 h30
  text "FREE_PINS" at 1852.4,1470.7 h30
  text "SERVO4" at 60.9,1457 h30
  text "SERVO1" at 159.3,1039.7 h30
  text "FLIGHT_CONTROLLER" at 1366,1003.8 h60
  text "INPUT 5V-24V" at 1125.1,975.1 h30 r90

## Text inside footprints (layer, text, board x,y; h text height)
U1: Mechanical 13 "*" at 1368.6,3751.1 h50 r180; Top Overlay "*" at 1368.6,3751.1 h50 r180
U6: Mechanical 13 "*" at 1789.34,2979.6 h50 r270